# EAGLE board InkTime (EAGLE 9.7.0)
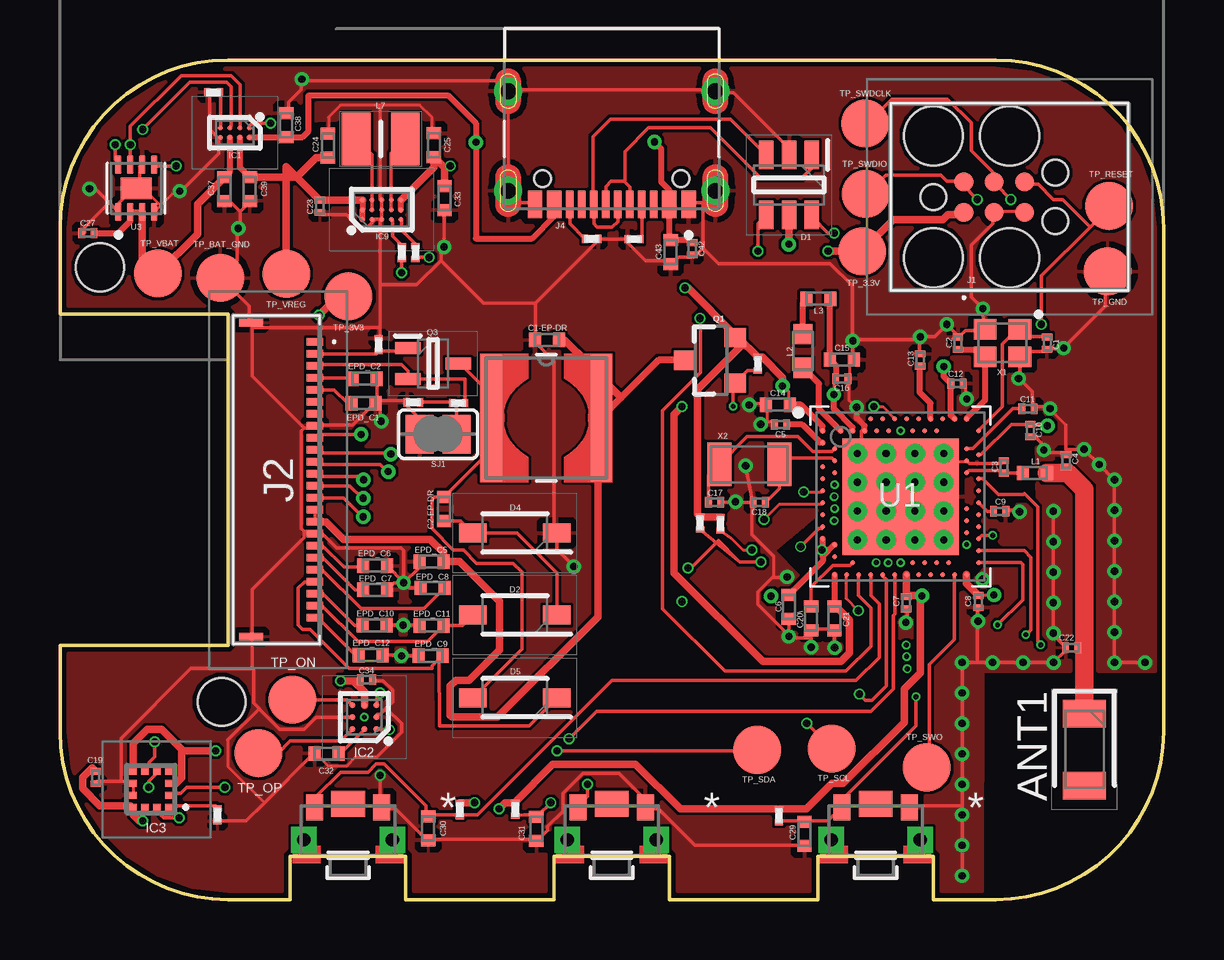
[diagram p0: board, top side]
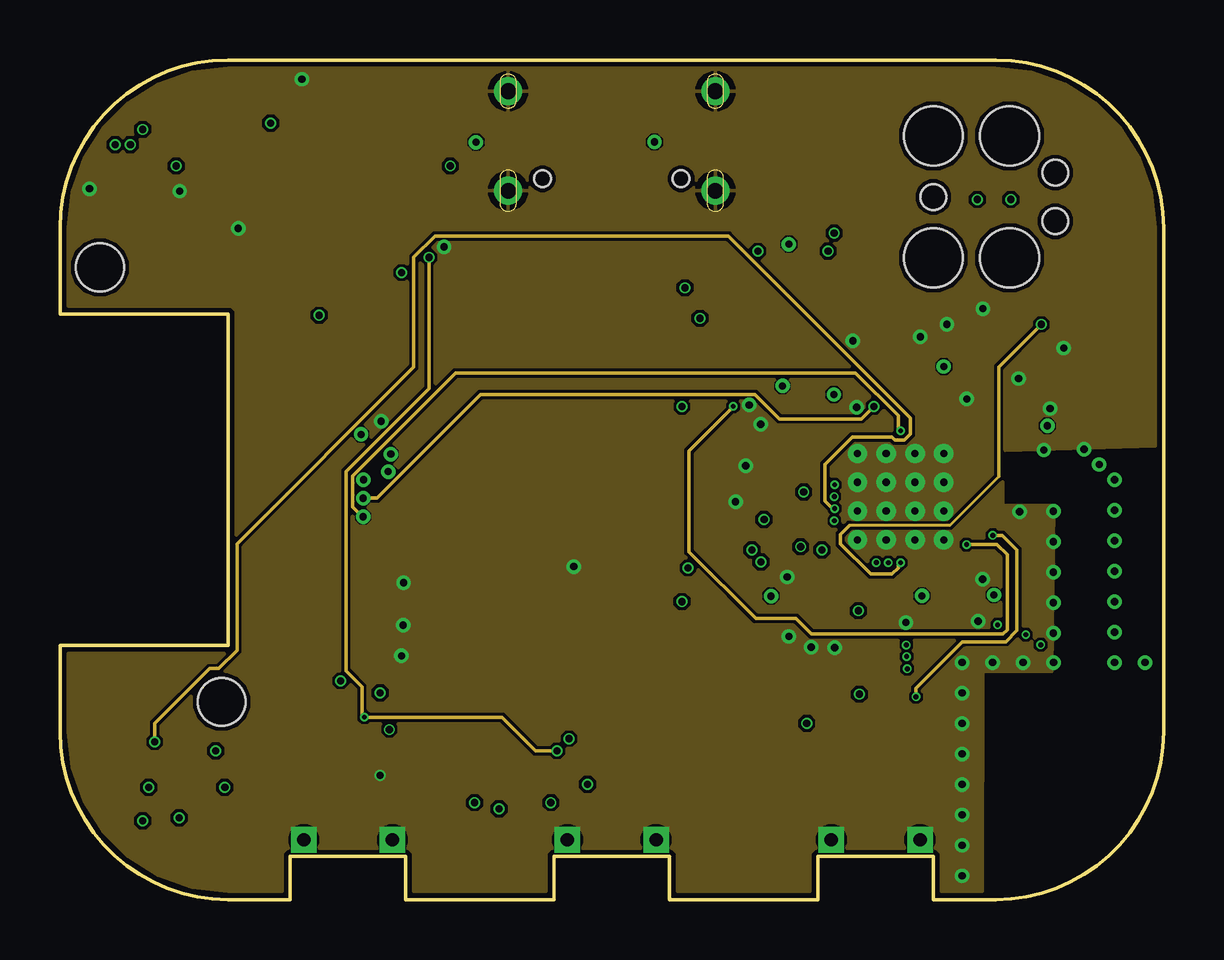
[diagram p1: board, inner layer GND]
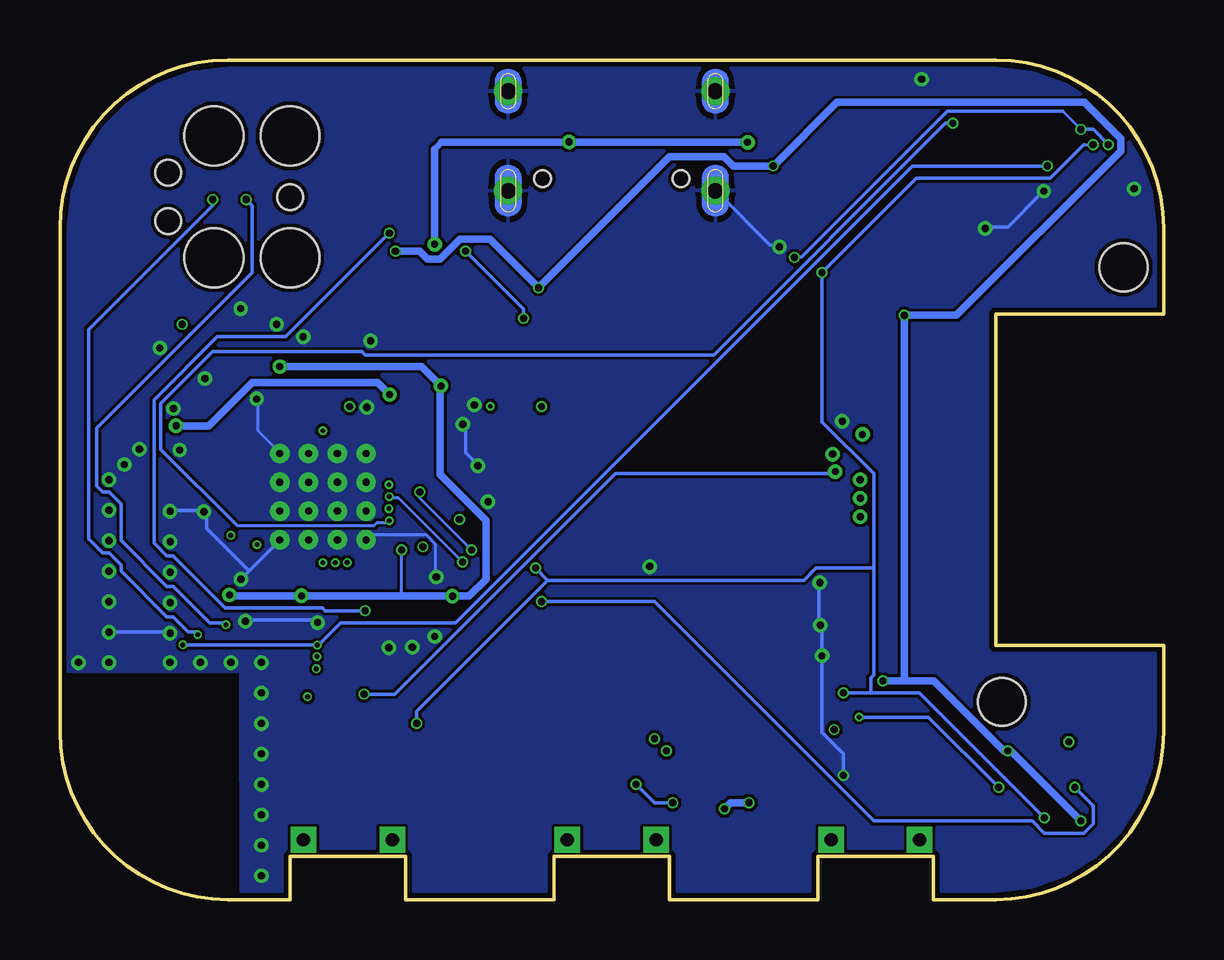
[diagram p2: board, bottom side, seen from below]

Size 46 x 35 mm. Coordinates in mm from the lower left corner, seen from the top.
Outline: 39,0 36.4,0 36.4,1.8 31.6,1.8 31.6,0 25.4,0 25.4,1.8 20.6,1.8 20.6,0 14.4,0 14.4,1.8 9.6,1.8 9.6,0 7,0 arc-90 0,7 0,10.6 7,10.6 7,24.4 0,24.4 0,28 arc-90 7,35 39,35 arc-90 46,28 46,7 arc-90 39,0
Copper layers (1+2*63+16): Top / GND / Bottom / layer 63
Stack-up 4 Layer Stack: Top SilkScreen Epoxy Ink / Top SolderMask User Defined 0.02mm Dk 4.3 / Top Surface Finish Lead-Free 0.02mm / Top User Defined 0.03mm / Dielectric-1 User Defined 0.034mm / Dielectric-2 User Defined 0.034mm / GND User Defined 0.03mm / Dielectric-3 User Defined 0.664mm / Power User Defined 0.03mm / Dielectric-4 User Defined 0.034mm / Dielectric-5 User Defined 0.034mm / Bottom User Defined 0.03mm / Bottom Surface Finish Lead-Free 0.02mm / Bottom SolderMask User Defined 0.02mm Dk 4.3 / Bottom SilkScreen Epoxy Ink
Design rules: minimum copper width 5mil, minimum drill size 0.2mm, copper clearance wire_polygon to wire_polygon 5mil, copper clearance wire_polygon to pad_smd 5mil, copper clearance wire_polygon to via 5mil, copper clearance pad_smd to pad_smd 5mil, copper clearance pad_smd to via 5mil, copper clearance via to via 5mil, copper clearance smd to pad (same net) 5mil, copper clearance smd to via (same net) 5mil, copper clearance smd to smd (same net) 5mil, dimension clearance 0.2mm, via restrict clearance 0mil, restrict clearance 0mil, drill distance 6mil, keepout clearance 0mil
Holes 2 mm at 1.66,26.35 6.74,8.24

## Footprints (pad centres in the part's own frame; a part is rotated, then mirrored left to right if it is on the bottom)
2450AT18B100E_ANTC3216X140N = smd 1.15 x 1.8: 1 -1.5,0; 2 1.5,0
NORDIC_NRF_3_RESC0201_L = smd 0.28 x 0.43: 1 -0.255,0; 2 0.255,0
NORDIC_NRF_3_RESC0402_L = smd 0.5 x 0.6: 1 -0.5,0; 2 0.5,0
SOT95P280X145-6N = smd 1.2 x 0.6: 1 -1.25,0.95; 2 -1.25,0; 3 -1.25,-0.95; 4 1.25,-0.95; 5 1.25,0; 6 1.25,0.95
ESP32_C6_LIBRARY_5_SOD3716X135N = smd 1.15 x 0.8: 1 -1.75,0; 2 1.75,0
BQ25180YBGR_BGA8C40P2X4_100X155X50 = smd 0.2 x 0.2: A1 -0.2,0.6; A2 0.2,0.6; B1 -0.2,0.2; B2 0.2,0.2; C1 -0.2,-0.2; C2 0.2,-0.2; D1 -0.2,-0.6; D2 0.2,-0.6
DRV2605YZFR_BGA9C50P3X3_144X144X62 = smd 0.25 x 0.25: A1 -0.5,0.5; A2 0,0.5; A3 0.5,0.5; B1 -0.5,0; B2 0,0; B3 0.5,0; C1 -0.5,-0.5; C2 0,-0.5; C3 0.5,-0.5
BMA423_BMA423 = smd 0.3 x 0.35: 1 -0.75,-0.775; 2 -0.25,-0.775; 3 0.25,-0.775; 4 0.75,-0.775; 7 0.75,0.775; 8 0.25,0.775; 9 -0.25,0.775; 10 -0.75,0.775 | smd 0.35 x 0.3: 5 0.775,-0.25; 6 0.775,0.25; 11 -0.775,0.25; 12 -0.775,-0.25
RT6160AWSC_BGA15C40P3X5_140X230X60 = smd 0.216 x 0.216: A1 -0.4,0.8; A2 0,0.8; A3 0.4,0.8; B1 -0.4,0.4; B2 0,0.4; B3 0.4,0.4; C1 -0.4,0; C2 0,0; C3 0.4,0; D1 -0.4,-0.4; D2 0,-0.4; D3 0.4,-0.4; E1 -0.4,-0.8; E2 0,-0.8; E3 0.4,-0.8
TC2030-IDC_TC2030IDC = smd 0.783 x 0.783: 1 -0.953,-0.635; 2 -0.953,0.635; 3 0.317,-0.635; 4 0.317,0.635; 5 1.588,-0.635; 6 1.588,0.635 | hole 2.451: -2.223,-2.54; -2.223,2.54; 0.952,-2.54; 0.952,2.54 | hole 1.067: -2.223,0; 2.857,-1.016; 2.857,1.016
503480-2400_5034802400 = smd 0.3 x 0.7: 1 -5.75,1.525; 2 -5.25,1.525; 3 -4.75,1.525; 4 -4.25,1.525; 5 -3.75,1.525; 6 -3.25,1.525; 7 -2.75,1.525; 8 -2.25,1.525; 9 -1.75,1.525; 10 -1.25,1.525; 11 -0.75,1.525; 12 -0.25,1.525; 13 0.25,1.525; 14 0.75,1.525; 15 1.25,1.525; 16 1.75,1.525; 17 2.25,1.525; 18 2.75,1.525; 19 3.25,1.525; 20 3.75,1.525; 21 4.25,1.525; 22 4.75,1.525; 23 5.25,1.525; 24 5.75,1.525 | smd 0.3 x 1: MP1 -6.54,-1.125; MP2 6.54,-1.125
KH-TYPE-C-16P_KINGHELM_KH-TYPE-C-16P = smd 0.6 x 1.15: A1_B12 -3.2,4.725; A4_B9 -2.4,4.725; A9_B4 2.4,4.725; A12_B1 3.2,4.725 | smd 0.3 x 1.15: A5 -1.25,4.725; A6 -0.25,4.725; A7 0.25,4.725; A8 1.25,4.725; B5 1.75,4.725; B6 0.75,4.725; B7 -0.75,4.725; B8 -1.75,4.725 | drill 0.65 pad 1.05: SH1 -4.32,0; SH2 4.32,0; SH3 -4.32,4.15; SH4 4.32,4.15 | hole 0.7: -2.89,3.65; 2.89,3.65
NORDIC_NRF_2_RESC0402_L = smd 0.5 x 0.6: 1 -0.5,0; 2 0.5,0
NORDIC_NRF_2_RESC0603_L = smd 0.85 x 0.8: 1 -0.7,0; 2 0.7,0
ESP32_C6_LIBRARY_2_IND_4828-WE-TPC_WRE = smd 0.9 x 5.3: 1 -2.286,0; 2 2.286,0
MLP2016SR47MT0S1_INDC2016X100N = smd 1.2 x 2.2: 1 -1.028,0; 2 1.028,0
ESP32_C6_LIBRARY_4_ESP32_C6_LIBRARY_4_ESP32_C6_LIBRARY_4_ESP32_C6_LIBRARY_4_ESP32_WROVER_SPARKFUN-DISCRETESEMI_SOT23-3 = smd 0.8 x 0.9: 1 -0.95,-1; 2 0.95,-1; 3 0,1.1
ESP32_C6_LIBRARY_6_SOT65P210X110-3N = smd 1.05 x 0.5: 1 -1.05,0.65; 2 -1.05,-0.65; 3 1.05,0
CPF0201D7K68C1_0201 = smd 0.35 x 0.25: 1 0,0.275; 2 0,-0.275
ESP32_C6_LIBRARY_7_JUMPER_SJ = smd 1.168 x 1.6: 1 -0.762,0; 2 0.762,0
2025-10-22_07-23-44_LIBRARY_SW_EVP-AKE31A_PAN = smd 0.711 x 1.092: 1 -1.4,-0.972; 2 1.4,-0.972 | drill 0.559 pad 0.914 square: 3 -1.848,0.381; 4 1.848,0.381 | smd 1.397 x 1.092: 5 0,-1.124
HECTOR_WATCH_1_TP20R = smd 2 x 2: TP 0,0
NORDIC_NRF_4_AQFN50P700X700X85_HS-74N = smd 4.85 x 4.85: P$74 0,0 | drill 0.3 pad 0.6: P$75 -1.8,1.8; P$76 -0.6,1.8; P$77 0.6,1.8; P$78 1.8,1.8; P$79 -1.8,0.6; P$80 -0.6,0.6; P$81 0.6,0.6; P$82 1.8,0.6; P$83 -1.8,-0.6; P$84 -0.6,-0.6; P$85 0.6,-0.6; P$86 1.8,-0.6; P$87 -1.8,-1.8; P$88 -0.6,-1.8; P$89 0.6,-1.8; P$90 1.8,-1.8 | smd 0.2 x 0.2: P$A8 -1.25,3.25; P$A10 -0.75,3.25; P$A12 -0.25,3.25; P$A14 0.25,3.25; P$A16 0.75,3.25; P$A18 1.25,3.25; P$A20 1.75,3.25; P$A22 2.25,3.25; P$A23 2.75,3.25; P$AA24 3.25,-2.25; P$AB2 -2.75,-2.5; P$AC5 -2,-2.75; P$AC9 -1,-2.75; P$AC11 -0.5,-2.75; P$AC13 0,-2.75; P$AC15 0.5,-2.75; P$AC17 1,-2.75; P$AC19 1.5,-2.75; P$AC21 2,-2.75; P$AC24 3.25,-2.75; P$AD2 -2.75,-3.25; P$AD4 -2.25,-3.25; P$AD6 -1.75,-3.25; P$AD8 -1.25,-3.25; P$AD10 -0.75,-3.25; P$AD12 -0.25,-3.25; P$AD14 0.25,-3.25; P$AD16 0.75,-3.25; P$AD18 1.25,-3.25; P$AD20 1.75,-3.25; P$AD22 2.25,-3.25; P$AD23 2.75,-3.25; P$B1 -3.25,2.75; P$B3 -2.5,2.75; P$B5 -2,2.75; P$B7 -1.5,2.75; P$B9 -1,2.75; P$B11 -0.5,2.75; P$B13 0,2.75; P$B15 0.5,2.75; P$B17 1,2.75; P$B19 1.5,2.75; P$B24 3.25,2.75; P$C1 -3.25,2.25; P$D2 -2.75,2; P$D23 2.75,2; P$E24 3.25,1.75; P$F2 -2.75,1.5; P$F23 2.75,1.5; P$G1 -3.25,1.25; P$H2 -2.75,1; P$H23 2.75,1; P$J1 -3.25,0.75; P$J24 3.25,0.75; P$K2 -2.75,0.5; P$L1 -3.25,0.25; P$L24 3.25,0.25; P$M2 -2.75,0; P$N1 -3.25,-0.25; P$N24 3.25,-0.25; P$P2 -2.75,-0.5; P$P23 2.75,-0.5; P$R1 -3.25,-0.75; P$R24 3.25,-0.75; P$T2 -2.75,-1; P$T23 2.75,-1; P$U1 -3.25,-1.25; P$U24 3.25,-1.25; P$V23 2.75,-1.5; P$W1 -3.25,-1.75; P$W24 3.25,-1.75; P$Y2 -2.75,-2; P$Y23 2.75,-2
ESP32_C6_LIBRARY_SON50P200X200X80-9N = smd 0.76 x 0.27: 1 -0.985,0.75; 2 -0.985,0.25; 3 -0.985,-0.25; 4 -0.985,-0.75; 5 0.985,-0.75; 6 0.985,-0.25; 7 0.985,0.25; 8 0.985,0.75 | smd 0.9 x 1.3: 9 0,0
NORDIC_NRF_BT-XTAL_2016_N = smd 0.95 x 0.85: 1 -0.725,-0.575; 2 0.725,-0.575; 3 0.725,0.575; 4 -0.725,0.575
NORDIC_NRF_1_XTAL_3215_N = smd 1 x 1.8: 1 -1.25,0; 2 1.25,0

## Placement (x,y rotation side)
ANT1  2450AT18B100E  [2450AT18B100E_ANTC3216X140N]  42.7,6.26 270 top
C1  12pF  [NORDIC_NRF_3_RESC0201_L]  41.15,23.19 90 top
C1-EP-DR  10uF  [NORDIC_NRF_3_RESC0402_L]  20.3,23.33 180 top
C2  12pF  [NORDIC_NRF_3_RESC0201_L]  37.43,23.19 90 top
C2-EP-DR  4.7uF/25V  [NORDIC_NRF_3_RESC0402_L]  16.01,16.29 90 top
C3  1pF  [NORDIC_NRF_3_RESC0201_L]  39.34,18.03 270 top
C4  1pF  [NORDIC_NRF_3_RESC0201_L]  41.94,18.28 270 top
C5  100nF  [NORDIC_NRF_3_RESC0201_L]  30.04,19.8 0 top
C6  4.7uF  [NORDIC_NRF_3_RESC0402_L]  30.38,12.19 270 top
C7  100nF  [NORDIC_NRF_3_RESC0201_L]  35.27,12.37 90 top
C8  100nF  [NORDIC_NRF_3_RESC0201_L]  38.28,12.42 90 top
C9  820pF  [NORDIC_NRF_3_RESC0201_L]  39.17,16.18 180 top
C10  N.C.  [NORDIC_NRF_3_RESC0201_L]  40.45,19.55 90 top
C11  100pF  [NORDIC_NRF_3_RESC0201_L]  40.35,20.46 180 top
C12  100nF  [NORDIC_NRF_3_RESC0201_L]  37.39,21.51 180 top
C13  N.C.  [NORDIC_NRF_3_RESC0201_L]  35.85,22.49 270 top
C14  4.7uF  [NORDIC_NRF_3_RESC0402_L]  29.93,20.63 180 top
C15  1.0uF  [NORDIC_NRF_3_RESC0402_L]  32.59,22.51 0 top
C16  47nF  [NORDIC_NRF_3_RESC0201_L]  32.59,21.7 180 top
C17  12pF  [NORDIC_NRF_3_RESC0201_L]  27.29,16.56 180 top
C18  12pF  [NORDIC_NRF_3_RESC0201_L]  29.15,16.56 0 top
C19  100nF  [NORDIC_NRF_3_RESC0201_L]  1.49,5.09 90 top
C20\  4.7uF  [NORDIC_NRF_3_RESC0402_L]  31.31,11.72 270 top
C21  4.7uF  [NORDIC_NRF_3_RESC0402_L]  32.28,11.72 270 top
C22  N.C.  [NORDIC_NRF_3_RESC0201_L]  42.17,10.5 0 top
C23  0.1uF  [NORDIC_NRF_3_RESC0201_L]  10.83,28.9 90 top
C24  10uF  [NORDIC_NRF_3_RESC0402_L]  11.17,31.43 270 top
C25  22uF  [NORDIC_NRF_3_RESC0402_L]  15.59,31.45 90 top
C27  0.1uF  [NORDIC_NRF_3_RESC0201_L]  1.16,27.78 180 top
C29  1uF  [NORDIC_NRF_3_RESC0402_L]  31.03,2.75 270 top
C30  1uF  [NORDIC_NRF_3_RESC0402_L]  15.35,2.97 270 top
C31  1uF  [NORDIC_NRF_3_RESC0402_L]  19.86,2.95 270 top
C32  1uF  [NORDIC_NRF_3_RESC0402_L]  11.11,6.08 180 top
C33  22uF  [NORDIC_NRF_3_RESC0402_L]  16.03,29.23 270 top
C34  0.1uF  [NORDIC_NRF_3_RESC0201_L]  12.78,9.17 0 top
C37  1uF  [NORDIC_NRF_3_RESC0402_L]  6.86,29.61 270 top
C38  1uF  [NORDIC_NRF_3_RESC0402_L]  9.43,32.29 90 top
C39  10uF  [NORDIC_NRF_3_RESC0402_L]  7.91,29.62 270 top
C42  0.1uF  [NORDIC_NRF_3_RESC0201_L]  26.35,27.13 270 top
C43  4.7uF  [NORDIC_NRF_3_RESC0402_L]  25.45,26.99 270 top
D1  USBLC6-2SC6Y  [SOT95P280X145-6N]  30.39,29.79 270 top
D2  MBR0530  [ESP32_C6_LIBRARY_5_SOD3716X135N]  18.96,11.86 180 top
D4  MBR0530  [ESP32_C6_LIBRARY_5_SOD3716X135N]  18.96,15.28 180 top
D5  MBR0530  [ESP32_C6_LIBRARY_5_SOD3716X135N]  18.96,8.41 180 top
EPD_C1  1uF/50V  [NORDIC_NRF_3_RESC0402_L]  12.66,20.69 180 top
EPD_C2  1uF/50V  [NORDIC_NRF_3_RESC0402_L]  12.7,21.71 180 top
EPD_C5  0.1uF/50V  [NORDIC_NRF_3_RESC0402_L]  15.48,14.09 0 top
EPD_C6  1uF/50V  [NORDIC_NRF_3_RESC0402_L]  13.13,13.92 180 top
EPD_C7  1uF/50V  [NORDIC_NRF_3_RESC0402_L]  13.13,12.91 180 top
EPD_C8  1uF/50V  [NORDIC_NRF_3_RESC0402_L]  15.53,12.99 0 top
EPD_C9  1uF/50V  [NORDIC_NRF_3_RESC0402_L]  15.45,10.16 0 top
EPD_C10  1uF/50V  [NORDIC_NRF_3_RESC0402_L]  13.11,11.43 180 top
EPD_C11  1uF/50V  [NORDIC_NRF_3_RESC0402_L]  15.49,11.42 0 top
EPD_C12  1uF/50V  [NORDIC_NRF_3_RESC0402_L]  12.95,10.19 180 top
IC1  BQ25180YBGR_BQ25180YBGR  [BQ25180YBGR_BGA8C40P2X4_100X155X50]  7.29,31.97 270 top
IC2  DRV2605YZFR  [DRV2605YZFR_BGA9C50P3X3_144X144X62]  12.69,7.6 180 top
IC3  BMA423  [BMA423_BMA423]  3.79,4.6 90 top
IC9  RT6160AWSC  [RT6160AWSC_BGA15C40P3X5_140X230X60]  13.41,28.76 90 top
J1  TC2030-IDC  [TC2030-IDC_TC2030IDC]  38.63,29.29 0 top
J2  503480-2400  [503480-2400_5034802400]  9.1,17.5 270 top
J4  KH-TYPE-C-16P  [KH-TYPE-C-16P_KINGHELM_KH-TYPE-C-16P]  23,33.7 180 top
L1  3.9nH  [NORDIC_NRF_2_RESC0402_L]  40.64,17.78 0 top
L2  10uH  [NORDIC_NRF_2_RESC0603_L]  30.97,22.87 270 top
L3  15nH  [NORDIC_NRF_2_RESC0402_L]  31.62,25.04 0 top
L5  68uH  [ESP32_C6_LIBRARY_2_IND_4828-WE-TPC_WRE]  20.27,20.08 0 top
L7  FTC252012SR47MBCA  [MLP2016SR47MT0S1_INDC2016X100N]  13.37,31.71 0 top
Q1  20V/4.2A/52mΩ/1.4W  [ESP32_C6_LIBRARY_4_ESP32_C6_LIBRARY_4_ESP32_C6_LIBRARY_4_ESP32_C6_LIBRARY_4_ESP32_WROVER_SPARKFUN-DISCRETESEMI_SOT23-3]  27.14,22.48 90 top
Q3  SI1308EDL-T1-GE3  [ESP32_C6_LIBRARY_6_SOT65P210X110-3N]  15.55,22.35 0 top
R1_EP_DR  0.47  [CPF0201D7K68C1_0201]  16.61,20.7 90 top
R1_USB  5K1  [CPF0201D7K68C1_0201]  23.93,27.53 90 top
R2  0  [CPF0201D7K68C1_0201]  14.82,26.97 0 top
R2_EP_DR  10K  [CPF0201D7K68C1_0201]  13.28,23.13 0 top
R2_USB  5K1  [CPF0201D7K68C1_0201]  22.17,27.54 90 top
R3  0  [CPF0201D7K68C1_0201]  6.56,3.53 0 top
R4  0  [CPF0201D7K68C1_0201]  14.25,26.97 0 top
R5  10K  [CPF0201D7K68C1_0201]  16.66,3.75 180 top
R7  10K  [CPF0201D7K68C1_0201]  29.97,3.49 180 top
R8  10K  [CPF0201D7K68C1_0201]  18.98,3.76 180 top
R9  10K  [CPF0201D7K68C1_0201]  6.4,33.64 90 top
R17  3K3  [CPF0201D7K68C1_0201]  26.68,15.7 0 top
R18  3K3  [CPF0201D7K68C1_0201]  27.53,15.67 0 top
R_PWR_EDP  10K  [CPF0201D7K68C1_0201]  29.09,22.33 180 top
R_TYPE_SEL  2.2  [CPF0201D7K68C1_0201]  14.73,20.73 90 top
SJ1  [ESP32_C6_LIBRARY_7_JUMPER_SJ]  15.76,19.4 0 top
SW1  2025-10-22_07-23-44_LIBRARY_EVP-AKE31ASW_EVP-AKE31A_PAN  [2025-10-22_07-23-44_LIBRARY_SW_EVP-AKE31A_PAN]  23,2.87 180 top
SW2  2025-10-22_07-23-44_LIBRARY_EVP-AKE31ASW_EVP-AKE31A_PAN  [2025-10-22_07-23-44_LIBRARY_SW_EVP-AKE31A_PAN]  12.01,2.87 180 top
SW3  2025-10-22_07-23-44_LIBRARY_EVP-AKE31ASW_EVP-AKE31A_PAN  [2025-10-22_07-23-44_LIBRARY_SW_EVP-AKE31A_PAN]  34,2.87 180 top
TP_3.3V  HECTOR_WATCH_1_TPTP20R  [HECTOR_WATCH_1_TP20R]  33.44,27.03 0 top
TP_3V3  HECTOR_WATCH_1_TPTP20R  [HECTOR_WATCH_1_TP20R]  12.02,25.15 0 top
TP_BAT_GND  HECTOR_WATCH_1_TPTP20R  [HECTOR_WATCH_1_TP20R]  6.68,25.92 0 top
TP_GND  HECTOR_WATCH_1_TPTP20R  [HECTOR_WATCH_1_TP20R]  43.67,26.18 0 top
TP_ON  HECTOR_WATCH_1_TPTP20R  [HECTOR_WATCH_1_TP20R]  9.68,8.33 0 top
TP_OP  HECTOR_WATCH_1_TPTP20R  [HECTOR_WATCH_1_TP20R]  8.27,6.1 0 top
TP_RESET  HECTOR_WATCH_1_TPTP20R  [HECTOR_WATCH_1_TP20R]  43.73,28.91 0 top
TP_SCL  HECTOR_WATCH_1_TPTP20R  [HECTOR_WATCH_1_TP20R]  32.17,6.3 0 top
TP_SDA  HECTOR_WATCH_1_TPTP20R  [HECTOR_WATCH_1_TP20R]  29.07,6.24 0 top
TP_SWDCLK  HECTOR_WATCH_1_TPTP20R  [HECTOR_WATCH_1_TP20R]  33.57,32.35 0 top
TP_SWDIO  HECTOR_WATCH_1_TPTP20R  [HECTOR_WATCH_1_TP20R]  33.59,29.41 0 top
TP_SWO  HECTOR_WATCH_1_TPTP20R  [HECTOR_WATCH_1_TP20R]  36.13,5.51 180 top
TP_VBAT  HECTOR_WATCH_1_TPTP20R  [HECTOR_WATCH_1_TP20R]  4.08,26.1 0 top
TP_VREG  HECTOR_WATCH_1_TPTP20R  [HECTOR_WATCH_1_TP20R]  9.43,26.09 0 top
U1  NRF52840_QF  [NORDIC_NRF_4_AQFN50P700X700X85_HS-74N]  35.04,16.79 0 top
U3  MAX17048G+T10  [ESP32_C6_LIBRARY_SON50P200X200X80-9N]  3.18,29.65 90 top
X1  32MHz  [NORDIC_NRF_BT-XTAL_2016_N]  39.29,23.2 180 top
X2  32.768kHz  [NORDIC_NRF_1_XTAL_3215_N]  28.73,18.14 0 top

## Library data of the parts
ANT1 = InkTime_v5; ARROW_PART_NUMBER: 2450AT18B100E; ARROW_PRICE-STOCK: https://www.arrow.com/en/products/2450at18b100e/johanson-dielectrics?utm_currency=USD&region=nac; DESCRIPTION: Antennas 2.45GHz ANTENNA; HEIGHT: 1.4mm; MANUFACTURER_NAME: JOHANSON TECHNOLOGY; MANUFACTURER_PART_NUMBER: 2450AT18B100E; MOUSER_PART_NUMBER: 609-2450AT18B100E; MOUSER_PRICE-STOCK: https://www.mouser.co.uk/ProductDetail/Johanson-Technology/2450AT18B100E?qs=yCnrNFeXz%252Bh5MFsFIXGZGA%3D%3D
C1 C1-EP-DR C2 C2-EP-DR C3-C19 C20\ C21-C25 C27 C29-C34 C37-C39 C42 C43 EPD_C1 EPD_C2 EPD_C5-EPD_C12 L1-L3 R1_EP_DR R1_USB R2 R2_EP_DR R2_USB R3-R5 R7-R9 R17 R18 R_PWR_EDP R_TYPE_SEL SJ1 TP_3.3V TP_3V3 TP_BAT_GND TP_GND TP_ON TP_OP TP_RESET TP_SCL TP_SDA TP_SWDCLK TP_SWDIO TP_SWO TP_VBAT TP_VREG U1 X1 X2 = InkTime_v5
D1 = InkTime_v5; ARROW_PART_NUMBER: USBLC6-2SC6Y; ARROW_PRICE-STOCK: https://www.arrow.com/en/products/usblc6-2sc6y/stmicroelectronics?utm_currency=USD&region=nac; DESCRIPTION: Low Cap. ESD Protection Auto SOT-23-6 STMicroelectronics USBLC6-2SC6Y, Dual Uni-Directional TVS Diode Array, 6-Pin SOT-23; HEIGHT: 1.45mm; MANUFACTURER_NAME: STMicroelectronics; MANUFACTURER_PART_NUMBER: USBLC6-2SC6Y; MOUSER_PART_NUMBER: 511-USBLC6-2SC6Y; MOUSER_PRICE-STOCK: https://www.mouser.co.uk/ProductDetail/STMicroelectronics/USBLC6-2SC6Y?qs=gNDSiZmRJS%2FOgDexvXkdow%3D%3D
D2 D4 D5 = InkTime_v5; AVAILABILITY: In Stock; CHECK_PRICES: https://www.snapeda.com/parts/MBR0530/Onsemi/view-part/?ref=eda; DESCRIPTION: Diode Schottky 30 V 500mA Surface Mount SOD-123; MF: ON Semiconductor; MP: MBR0530; PACKAGE: SOD-123-2 ON Semiconductor; PRICE: None; PURCHASE-URL: https://www.snapeda.com/api/url_track_click_mouser/?unipart_id=179458&manufacturer=ON Semiconductor&part_name=MBR0530&search_term=None; SNAPEDA_LINK: https://www.snapeda.com/parts/MBR0530/Onsemi/view-part/?ref=snap
IC1 = InkTime_v5; ARROW_PART_NUMBER: BQ25180YBGR; ARROW_PRICE-STOCK: https://www.arrow.com/en/products/bq25180ybgr/texas-instruments?utm_currency=USD&region=nac; DESCRIPTION: Charger IC Lithium Ion/Polymer, Lithium Iron Phosphate 8-DSBGA (1.6x1.1); HEIGHT: 0.5mm; MANUFACTURER_NAME: Texas Instruments; MANUFACTURER_PART_NUMBER: BQ25180YBGR; MOUSER_PART_NUMBER: 595-BQ25180YBGR; MOUSER_PRICE-STOCK: https://www.mouser.co.uk/ProductDetail/Texas-Instruments/BQ25180YBGR?qs=doiCPypUmgEWjAK%252BJAX6Tw%3D%3D
IC2 = InkTime_v5; ARROW_PART_NUMBER: DRV2605YZFR; ARROW_PRICE-STOCK: https://www.arrow.com/en/products/drv2605yzfr/texas-instruments?region=nac; DESCRIPTION: Haptic Driver for ERM/LRA with Built-In Library and Smart Loop Architecture; HEIGHT: 0.625mm; MANUFACTURER_NAME: Texas Instruments; MANUFACTURER_PART_NUMBER: DRV2605YZFR
IC3 = InkTime_v5; ARROW_PART_NUMBER: BMA423; ARROW_PRICE-STOCK: https://www.arrow.com/en/products/bma423/bosch; DESCRIPTION: Accelerometers Triaxial low-g 12bit Acceleration Sensor; HEIGHT: 1mm; MANUFACTURER_NAME: BOSCH; MANUFACTURER_PART_NUMBER: BMA423; MOUSER_PART_NUMBER: 262-BMA423; MOUSER_PRICE-STOCK: https://www.mouser.co.uk/ProductDetail/Bosch-Sensortec/BMA423?qs=HXFqYaX1Q2xC%252BSgeGoX3mg%3D%3D
IC9 = InkTime_v5; DESCRIPTION: Buck-Boost Regulator Positive Output Step-Up/Step-Down I2C DC-DC Controller IC 15-WL-CSP (BSC) (1.4x2.3); HEIGHT: 0.6mm; MANUFACTURER_NAME: RICHTEK; MANUFACTURER_PART_NUMBER: RT6160AWSC; MOUSER_PART_NUMBER: 835-RT6160AWSC; MOUSER_PRICE-STOCK: https://www.mouser.co.uk/ProductDetail/Richtek/RT6160AWSC?qs=amGC7iS6iy%2FLd9PSoixZXQ%3D%3D
J1 = InkTime_v5; DESCRIPTION: CABLE ADAPTER 6 POS; HEIGHT: 19mm; MANUFACTURER_NAME: Tag Connect; MANUFACTURER_PART_NUMBER: TC2030-IDC
J2 = InkTime_v5; DESCRIPTION: FFC & FPC Connectors 0.5mm FPC RA SMT Dual Contact 24Ckt; HEIGHT: 1.87mm; MANUFACTURER_NAME: Molex; MANUFACTURER_PART_NUMBER: 503480-2400; MOUSER_PART_NUMBER: 538-503480-2400; MOUSER_PRICE-STOCK: https://www.mouser.co.uk/ProductDetail/Molex/503480-2400?qs=OAhjpuo3Vu7efIoxFh9AOw%3D%3D
J4 = InkTime_v5; AVAILABILITY: Not in stock; CHECK_PRICES: https://www.snapeda.com/parts/KH-TYPE-C-16P/Kinghelm/view-part/?ref=eda; MF: kinghelm; MP: KH-TYPE-C-16P; PACKAGE: None; PRICE: None; SNAPEDA_LINK: https://www.snapeda.com/parts/KH-TYPE-C-16P/Kinghelm/view-part/?ref=snap
L5 = InkTime_v5; COPYRIGHT: Copyright (C) 2024 Ultra Librarian. All rights reserved.; MANUFACTURER_PART_NUMBER: 744043680; MFR_NAME: Wurth Electronics
L7 = InkTime_v5; DESCRIPTION: SMD / SMT Inductors (Coils), L=0.47?H, L x W x T :; HEIGHT: 1mm; JLCPCB: https://jlcpcb.com/partdetail/6763488-FTC252012SR47MBCA/C5832368; MANUFACTURER_NAME: TDK; MANUFACTURER_PART_NUMBER: FTC252012SR47MBCA
Q1 = InkTime_v5; PROD_ID: TRAN-14388
Q3 = InkTime_v5; AVAILABILITY: In Stock; CHECK_PRICES: https://www.snapeda.com/parts/SI1308EDL-T1-GE3/Vishay+Siliconix/view-part/?ref=eda; DESCRIPTION: Si1308EDL-T1-GE3 N-channel MOSFET Transistor, 1.5 A, 30 V, 3-Pin SC-70 | Siliconix / Vishay SI1308EDL-T1-GE3; MF: Vishay Siliconix; MP: SI1308EDL-T1-GE3; PACKAGE: SOT-323 Vishay Semiconductor; PRICE: None; PURCHASE-URL: https://www.snapeda.com/api/url_track_click_mouser/?unipart_id=274603&manufacturer=Vishay Siliconix&part_name=SI1308EDL-T1-GE3&search_term=None; SNAPEDA_LINK: https://www.snapeda.com/parts/SI1308EDL-T1-GE3/Vishay+Siliconix/view-part/?ref=snap
SW1-SW3 = InkTime_v5; COPYRIGHT: Copyright (C) 2025 Ultra Librarian. All rights reserved.; DIGI-KEY_PART_NUMBER_1: P123437TR-ND; DIGI-KEY_PART_NUMBER_2: P123437CT-ND; DIGI-KEY_PART_NUMBER_3: P123437DKR-ND; MANUFACTURER_NAME: Panasonic; MANUFACTURER_PART_NUMBER: EVP-AKE31A
U3 = InkTime_v5; AVAILABILITY: In Stock; CHECK_PRICES: https://www.snapeda.com/parts/MAX17048G+T10/Analog+Devices/view-part/?ref=eda; DESCRIPTION: 3µA 1-Cell/2-Cell Fuel Gauge with ModelGauge; MF: Analog Devices; MP: MAX17048G+T10; PACKAGE: TDFN-8 Maxim; PRICE: None; PURCHASE-URL: https://www.snapeda.com/api/url_track_click_mouser/?unipart_id=329239&manufacturer=Analog Devices&part_name=MAX17048G+T10&search_term=None; SNAPEDA_LINK: https://www.snapeda.com/parts/MAX17048G+T10/Analog+Devices/view-part/?ref=snap

## Nets
3V3: C6.1 C7.2 C8.2 C12.2 C14.1 C19.2 C25.1 C33.1 C34.1 IC2.C2 IC3.3 IC3.7 IC3.10 IC9.E2 IC9.E3 J1.1 Q1.2 R5.2 R7.2 R8.2 R17.1 R18.1 R_PWR_EDP.2 TP_3.3V.TP TP_3V3.TP U1.P$A22 U1.P$AD14 U1.P$AD23 U1.P$B1 U1.P$W1 U1.P$Y2
ALERT: U1.P$J24 U3.5
D+: D1.4 U1.P$AD6
D-: D1.6 U1.P$AD4
DEC1: C5.2 U1.P$C1
DEC3: C11.2 U1.P$D23
DEC4_6: C10.2 C15.1 C16.2 L3.2 U1.P$B5 U1.P$E24
DN: D1.1 J4.A7 J4.B7
DP: D1.3 J4.A6 J4.B6
EPD_3V3: C1-EP-DR.1 EPD_C5.2 J2.15 J2.16 L5.2 Q1.3
EPD_BUSY: J2.9 U1.P$AD12
EPD_CS: J2.12 U1.P$K2
EPD_DC: J2.11 U1.P$AD10
EPD_RST: J2.10 U1.P$AC11
GDR: J2.2 Q3.1 R2_EP_DR.2
GND: C1-EP-DR.2 C1.1 C2.2 C3.1 C4.1 C5.1 C6.2 C7.1 C8.1 C9.1 C10.1 C11.1 C12.1 C13.1 C14.2 C15.2 C16.1 C17.1 C18.1 C19.1 C20\.2 C21.2 C22.1 C23.1 C24.1 C25.2 C27.2 C29.2 C30.2 C31.2 C32.2 C33.2 C34.2 C37.2 C38.2 C39.2 C42.2 C43.2 D1.2 D4.1 EPD_C1.1 EPD_C2.1 EPD_C5.1 EPD_C6.1 EPD_C7.1 EPD_C8.1 EPD_C9.1 EPD_C10.1 EPD_C11.1 EPD_C12.1 IC1.D2 IC2.B1 IC2.B3 IC3.8 IC3.9 IC9.B1 IC9.C1 IC9.C2 IC9.C3 J1.3 J1.5 J2.8 J2.17 J2.MP1 J2.MP2 J4.A1_B12 J4.A12_B1 J4.SH1 J4.SH2 J4.SH3 J4.SH4 R1_USB.1 R2_EP_DR.1 R2_USB.2 R3.2 R9.1 R_TYPE_SEL.1 SJ1.1 SW1.1 SW2.1 SW3.1 TP_BAT_GND.TP TP_GND.TP U1.P$74 U1.P$75 U1.P$76 U1.P$77 U1.P$78 U1.P$79 U1.P$80 U1.P$81 U1.P$82 U1.P$83 U1.P$84 U1.P$85 U1.P$86 U1.P$87 U1.P$88 U1.P$89 U1.P$90 U1.P$B7 U1.P$F23 U3.1 U3.4 U3.6 U3.9 X1.2 X1.4
HAPTIC_EN: IC2.A1 U1.P$U1
IMU_INT1: IC3.5 U1.P$N1
IMU_INT2: IC3.6 U1.P$P2
LX1: IC9.B2 IC9.B3 L7.1
LX2: IC9.D2 IC9.D3 L7.2
MOSI: J2.14 U1.P$B13
N$1: IC9.E1 R2.1
N$2: IC1.D1 R9.2
N$3: IC9.D1 R4.1
N$4: C9.2 U1.P$N24
N$5: IC3.1 R3.1
N$6: C1.2 U1.P$B24 X1.1
N$7: C3.2 L1.1 U1.P$H23
N$8: L2.1 L3.1
N$11: C13.2 U1.P$A18
N$14: L2.2 U1.P$B3
N$15: C20\.1 U1.P$AC5
N$19: C2-EP-DR.2 D5.2 L5.1 Q3.3
N$20: R1_EP_DR.1 R_TYPE_SEL.2 SJ1.2
N$21: C2-EP-DR.1 D2.1 D4.2
N$22: EPD_C2.2 J2.4
N$23: EPD_C1.2 J2.5
N$24: C32.1 IC2.A2
N$25: EPD_C6.2 J2.18
N$26: EPD_C7.2 J2.19
N$27: EPD_C8.2 J2.20
N$28: J4.B5 R2_USB.1
N$29: EPD_C10.2 J2.22
N$30: C2.1 U1.P$A23 X1.3
N$31: EPD_C12.2 J2.24
N$34: J4.A5 R1_USB.2
OUT+: IC2.A3 TP_OP.TP
OUT-: IC2.C3 TP_ON.TP
P0.00/XL1: C17.2 U1.P$D2 X2.1
P0.01/XL2: C18.2 U1.P$F2 X2.2
P0.13: C30.1 R5.1 SW2.2 U1.P$AD8
P0.14: C31.1 R8.1 SW1.2 U1.P$AC9
P1.01: Q1.1 R_PWR_EDP.1 U1.P$Y23
P1.02: C29.1 R7.1 SW3.2 U1.P$W24
PMIC_INT: IC1.A1 U1.P$T2
PREVGH: D5.1 EPD_C9.2 J2.21
PREVGL: D2.2 EPD_C11.2 J2.23
RESE: J2.3 Q3.2 R1_EP_DR.2
RESET: J1.6 TP_RESET.TP U1.P$AC13
RF: ANT1.1 C4.2 C22.2 L1.2
SCK: J2.13 U1.P$A12
SCL: IC1.B1 IC2.C1 IC3.12 R4.2 R17.2 TP_SCL.TP U1.P$M2 U3.7
SDA: IC1.C1 IC2.B2 IC3.2 R2.2 R18.2 TP_SDA.TP U1.P$L1 U3.8
SWDCLK: J1.4 TP_SWDCLK.TP U1.P$AA24
SWDIO: J1.2 TP_SWDIO.TP U1.P$AC24
SWO: TP_SWO.TP U1.P$AD22
VBAT: C27.1 C37.1 IC1.C2 TP_VBAT.TP U3.2 U3.3
VBUS: C21.1 C38.1 C42.1 C43.1 D1.5 IC1.A2 J4.A4_B9 J4.A9_B4 U1.P$AD2
VREG: C23.2 C24.2 C39.1 IC1.B2 IC9.A1 IC9.A2 IC9.A3 TP_VREG.TP

## Tracks (layer width: path | path; a pad name or v marks a point on that pad's centre or on a via)
3V3  (via drill 0.3, 0.3 pad 0.6)
  Top 0.127: 2.93,3.91 IC3.10 | 3.06,5.44 IC3.7 | 12.46,9.12 C34.1 | 11.57,25.12 11.95,25.12 TP_3V3.TP | 29.86,3.78 R7.2 29.98,3.78 | 37.61,28.55 J1.1 | 33.54,27.15 TP_3.3V.TP 33.41,27.02 | U1.P$W1 31.76,15.09 U1.P$W1 | v31.76,14.58 31.8,14.58 | 35.32,12.67 C7.2 | C8.2 38.37,12.67 38.88,12.67 v38.93,12.7 | C14.1 30.37,20.68 30.37,21.18 30.24,21.31 v30.12,21.41 | 35.86,12.58 v35.93,12.66
  Top 0.25: C6.1 31.8,14.11 31.8,14.3 | 31.8,14.3 31.8,14.58 U1.P$W1 | U1.P$Y2 31.8,14.3
  Top 0.254: U1.P$B1 31.79,19.73 30.89,20.63 C14.1 | U1.P$A22 37.13,20.2 C12.2 36.84,21.81 v36.84,22.22 | IC9.E2 IC9.E3
  Top 0.305: U1.P$AD23 37.79,13.17 C8.2 | U1.P$AD14 35.29,12.65 C7.2 | IC9.E3 15.59,30.54 C25.1 16.03,30.51 | C33.1 16.03,30.51 | Q1.2 28.27,23.43 R_PWR_EDP.2 29.27,22.61 30.12,21.76 v30.12,21.41 | 2.93,3.91 1.66,3.91 0.94,4.64 0.94,5.08 1.35,5.5 C19.2 | IC3.3 4.84,4.85 5.07,5.07 5.07,6.2 5.13,6.2 | 5.13,6.2 4.24,7.09 3.63,7.09 3.06,6.51 3.06,5.44 | v11.7,9.12 12.22,9.12 | 12.22,9.12 12.46,9.12 | 5.13,6.2 v6.49,6.2 | v3.44,3.28 3.31,3.28 3.06,3.53 3.06,3.78 IC3.10 | v10.81,24.36 11.57,25.12 | v17.29,4.04 16.78,4.04 R5.2 | 29.86,3.78 25.86,3.78 24,5.64 20.54,5.64 18.98,4.08 R8.2 18.55,4.04 v18.3,3.78 | 37.61,28.55 37.02,28.55 36.81,28.34 34.73,28.34 33.54,27.15 | Q1.2 28.44,23.11 26.58,21.26 26.58,16.07 R17.1 26.71,15.95 R18.1 | 35.32,12.67 35.83,12.67 v35.93,12.66 | Q1.2 28.14,23.53 26.17,25.5 v26.05,25.5 | v32.02,27.02 33.41,27.02 | 29.98,3.78 31.12,3.78 32.17,4.84 32.64,4.84 35.19,7.39 35.19,8.78 35.86,9.45 35.86,12.58 | v16.27,30.58 16.2,30.51 16.03,30.51 | IC2.C2 12.69,8.65 12.22,9.12
  Bottom 0.127: v6.49,6.2 6.36,6.2 | 31.76,12.66 v31.76,14.58
  Bottom 0.305: v38.93,12.7 38.89,12.66 v35.93,12.66 31.76,12.66 v29.65,12.66 v29.64,12.65 28.94,12.65 28.24,13.35 28.24,15.81 30.15,17.72 30.15,21.38 v30.12,21.41 30.93,22.22 v36.84,22.22 | 10.81,9.12 9.58,9.12 6.66,6.2 v6.49,6.2 | 10.81,9.12 v11.7,9.12 | 6.36,6.2 v3.44,3.28 | 10.81,9.12 v10.81,24.36 8.64,24.36 1.79,31.2 1.79,31.73 3.3,33.23 13.62,33.23 v16.27,30.58 17.94,30.58 18.32,30.96 20.58,30.96 v26.05,25.5 28.08,27.53 29.32,27.53 30.16,26.69 30.67,26.69 31,27.02 v32.02,27.02 | v17.29,4.04 18.05,4.04 v18.3,3.78
ALERT  (via drill 0.2 pad 0.35, 0.3)
  Top 0.127: 3.95,30.58 U3.5 | v40.89,10.63 40.91,10.64 v40.88,10.62
  Top 0.152: U1.P$J24 38.46,17.54 39.11,16.89 40.15,16.89 40.19,16.93 40.75,16.37 40.75,10.77 v40.89,10.63 | v4.84,30.58 3.95,30.58
  Bottom 0.127: 35.19,10.64 v35.28,10.61
  Bottom 0.152: v35.28,10.61 v40.87,10.61 v40.88,10.62 | v4.84,30.58 10.47,30.58 29.52,11.53 34.3,11.53 35.19,10.64
D+  (via drill 0.3)
  Top 0.127: 33.29,13.56 U1.P$AD6 | 29.35,28.42 D1.4
  Top 0.152: 33.29,13.56 33.29,12.67 33.8,12.17 33.8,10.56 32.76,9.52 27.72,9.52 25.12,12.12 25.12,20.38 26.7,21.96 26.7,24.21 v26.68,24.23 | v29.1,27.02 29.1,28.17 29.35,28.42
  Bottom 0.152: v26.68,24.23 26.68,24.61 v29.1,27.02
D-  (via drill 0.3)
  Top 0.127: v33.29,12.04 32.78,12.55 32.78,13.56 U1.P$AD4 | 31.38,28.42 D1.6
  Top 0.152: v32.27,27.79 32.02,27.79 31.38,28.42
  Bottom 0.152: v33.29,12.04 34.94,12.04 35.05,12.15 39.11,12.15 41.29,14.32 41.54,14.32 42.08,14.86 42.08,20.83 39.44,23.47 36.59,23.47 v32.27,27.79
DEC1
  Top 0.254: C5.2 30.3,19.79 30.94,19.79 31.69,19.04 U1.P$C1
DEC3
  Top 0.152: U1.P$D23 38.05,18.79 39.72,20.46 C11.2
DEC4_6  (via drill 0.3 pad 0.6)
  Top 0.127: C16.2 32.27,21.69 32.27,21.06 v32.26,21.05 | 40.53,19.79 C10.2
  Top 0.152: U1.P$E24 38.39,18.54 39.66,19.81 C10.2 | 40.53,19.79 41.03,19.79 v41.16,19.75
  Top 0.254: U1.P$B5 33.04,19.68 32.26,20.46 v32.26,21.05 | L3.2 32.09,25.01 C15.1 32.34,22.27 C16.2
  Bottom 0.305: v32.26,21.05 32.76,21.55 38,21.55 39.8,19.75 v41.16,19.75
DN
  Top 0.152: J4.B7 23.75,29.7 23.51,29.94 | 23.51,29.94 22.97,29.94 22.75,29.72 J4.A7 | 23.51,29.94 23.55,29.98 23.55,31.18 24.54,32.17 27.11,32.17 29.19,30.09 30.93,30.09 31.34,30.5 D1.1
DP
  Top 0.152: J4.A6 23.25,28.27 23.02,28.04 22.39,28.04 22.25,28.18 J4.B6 22.21,29.02 22.21,31.81 22.94,32.54 27.94,32.54 D1.3
EPD_3V3
  Top 0.127: 21.98,22.33 22.01,22.36
  Top 0.152: J2.15 J2.16 | 16.27,7.68 16.34,7.61 | 22.42,19.94 L5.2 | C1-EP-DR.1 21.04,23.33
  Top 0.3: Q1.3 24.96,22.48 23.39,20.92 L5.2
  Top 0.305: J2.16 11.09,15.75 11.82,15.02 15.43,15.02 15.98,14.47 EPD_C5.2 16.66,14.09 18.33,12.42 18.33,10.41 17.05,9.13 16.5,9.13 16.27,8.9 16.27,7.68 | 16.34,7.61 18.24,7.61 22.42,11.79 22.42,19.94 | 21.04,23.33 22.01,22.36 | 23.39,20.92 21.98,22.33
EPD_BUSY  (via drill 0.3, 0.3 pad 0.6)
  Top 0.127: 34.81,13.56 U1.P$AD12
  Top 0.152: J2.9 10.77,19.39 v12.55,19.39 | 34.81,13.56 34.81,11.91 34.75,11.85 34.75,8.79 33.81,7.85 22.36,7.85 v21.22,6.71
  Power 0.152: v21.22,6.71 20.08,6.71 19.95,6.83 14.11,6.83 13.86,6.58 13.09,6.58 12.21,7.47 12.21,19.02 12.46,19.28 v12.55,19.39
EPD_CS  (via drill 0.2 pad 0.35, 0.3 pad 0.6)
  Top 0.127: U1.P$K2 32.27,17.25 U1.P$K2 | 10.68,17.63 J2.12
  Top 0.152: 10.68,17.63 12.46,17.63 12.59,17.5 v12.65,17.5
  Power 0.127: 12.84,17.37 12.71,17.5 v12.65,17.5 | 32.27,17.37 U1.P$K2
  Power 0.152: 32.27,17.37 31.26,17.37 31.13,17.5 13.98,17.5 13.86,17.37 12.84,17.37
  other vias: 32.29,17.29
EPD_DC  (via drill 0.3, 0.3 pad 0.6)
  Top 0.127: 10.68,18.14 J2.11
  Top 0.152: U1.P$AD10 34.29,13.49 34.44,13.34 34.44,8.91 33.84,8.31 33.58,8.31 v33.33,8.56 | 10.68,18.14 13.35,18.14 13.6,17.88 v13.68,17.84
  Bottom 0.152: v33.33,8.56 32.05,8.56 22.85,17.75 13.73,17.75 v13.68,17.84
EPD_RST  (via drill 0.2 pad 0.35, 0.3 pad 0.6)
  Top 0.127: U1.P$AC11 34.56,14.07 v34.53,14.04
  Top 0.152: v13.79,18.57 13.74,18.62 10.76,18.62 J2.10
  Power 0.127: 13.8,18.71 v13.79,18.57
  Power 0.152: 13.8,18.71 14.36,19.28 34.68,19.28 34.81,19.15 35.19,19.15 35.32,19.28 37.1,19.28 38.24,18.14 38.24,14.71 37.1,13.56 34.94,13.56 34.56,13.94 v34.53,14.04
GDR
  Top 0.152: J2.2 13.18,22.75 R2_EP_DR.2 14.36,22.86 Q3.1
GND  (via drill 0.3, 0.3 pad 0.6)
  Top 0.127: 30.37,11.02 v30.38,10.97 | 32.27,11.28 C21.2 | 31.38,11.28 C20\.2 | 29.48,19.91 29.73,19.91 C5.1 | 29.48,19.91 29.22,19.91 v29.21,19.81 29.48,19.91 | v28.73,20.62 28.84,20.68 29.35,20.68 C14.2 29.48,20.55 29.48,19.91 | v28.15,16.59 v28.16,16.58 28.18,16.56 | 28.59,18.01 v28.58,18.08 | 28.84,16.69 C18.1 28.84,16.55 | 29.73,14.32 29.73,13.47 29.73,13.44 | J1.5 40.14,28.68 39,28.68 J1.3 38.88,28.55 | 38.49,24.61 v38.47,24.63 38.37,24.74 | 38.49,23.85 X1.2 38.49,23.72 | 35.83,22.83 C13.1 | 35.95,23.47 v35.86,23.46 35.83,23.34 | v36.97,23.98 | 37.48,23.47 C2.2 | v37.8,20.87 37.73,20.93 37.73,21.44 C12.1 | 33.03,23.21 v33.05,23.29 | 33.03,22.58 C15.2 33.03,22.45 32.91,22.33 32.91,21.82 C16.1 32.91,21.69 32.91,20.8 33.16,20.55 v33.21,20.52 | 33.29,18.64 33.41,18.77 | 36.84,18.52 37.1,18.26 37.73,18.26 U1.P$F23 | 33.29,16.1 33.29,15.09 U1.P$87 | 33.29,16.1 U1.P$83 | 33.29,16.1 U1.P$74 | U1.P$79 33.29,17.5 33.54,17.5 33.92,17.88 U1.P$74 | U1.P$88 34.43,15.09 34.43,16.1 U1.P$74 | U1.P$84 34.56,16.23 U1.P$74 | U1.P$80 34.43,17.5 U1.P$74 | U1.P$89 35.7,15.09 35.7,16.1 U1.P$74 | U1.P$74 35.57,16.23 U1.P$85 35.7,16.23 36.72,16.23 U1.P$86 36.84,16.1 36.84,15.09 U1.P$90 | U1.P$81 35.7,17.5 U1.P$74 | 33.29,18.64 U1.P$75 | 33.29,18.64 U1.P$74 | U1.P$76 34.43,18.52 33.92,18.01 U1.P$74 | 36.34,17.88 36.72,17.5 U1.P$82 | 36.34,17.88 36.21,17.88 U1.P$74 | 36.34,17.88 35.7,18.52 U1.P$77 | 36.34,17.88 U1.P$74 | 36.84,18.52 U1.P$78 | 36.84,18.52 U1.P$74 | 33.16,23.34 v33.05,23.29 | 41.92,10.39 C22.1 41.92,10.52 | 41.41,11.02 v41.41,11.11 41.41,11.15 | 39.51,16.23 C9.1 | 41.41,12.42 v41.41,12.38 41.41,12.29 | 41.41,13.56 v41.41,13.64 41.41,13.69
  Top 0.127: 41.41,14.96 v41.41,14.91 41.41,14.83 | 41.41,16.1 v41.41,16.18 | 35.45,3.91 SW3.1 | 35.32,12.04 C7.1 | 38.24,11.66 v38.27,11.6 38.24,11.53 | 38.24,12.17 C8.1 | 41.8,22.96 v41.84,22.99 41.92,23.09 | 41.16,22.96 C1.1 41.03,22.83 | 41.16,20.55 v41.27,20.47 41.29,20.42 41.92,19.79 | 40.65,20.55 C11.1 40.53,20.55 | 40.02,21.82 v39.96,21.72 40.02,21.69 | 40.02,22.58 X1.4 40.02,22.71 40.14,22.83 | 41.03,18.64 v41.01,18.74 | 41.85,18.64 C4.1 41.99,18.77 41.92,18.77 | 40.65,19.28 40.53,19.28 C10.1 | 43.57,26.14 TP_GND.TP | 26.94,29.06 26.81,29.06 | 26.3,29.06 J4.A1_B12 | 27.32,29.44 J4.SH3 | 25.79,26.77 25.54,26.52 C43.2 | 26.3,26.77 C42.2 26.43,26.77 | 23.64,27.53 R1_USB.1 23.64,27.41 | 19.82,23.34 C1-EP-DR.2 19.82,23.21 | 22.49,27.53 R2_USB.2 | 20.59,15.34 D4.1 | 16.02,27.28 v16.01,27.21 | 16.02,28.68 C33.2 | 19.7,29.06 J4.A12_B1 | 18.68,29.44 J4.SH4 18.68,29.56 18.68,33.63 J4.SH2 | C24.1 11.19,31.98 11.19,32.61 11.7,33.12 13.35,33.12 15,33.12 15.51,32.61 15.51,31.98 C25.2 | 13.35,28.3 IC9.C1 | 13.09,28.3 IC9.B1 | 13.35,29.18 IC9.C3 | 30.37,31.34 30.37,31.09 D1.2 | 27.45,33.63 J4.SH1 27.32,33.76 | 9.54,32.87 C38.2 | 10.17,34.14 v10.08,34.2 | 18.55,33.76 J4.SH2 | 18.68,33.76 J4.SH2 | 15.25,2.51 C30.2 15.38,2.51 | 13.47,3.78 SW2.1 13.35,3.91 | 19.82,2.51 C31.2 19.95,2.51 | 31,2.26 C29.2 | 24.52,3.78 SW1.1 24.4,3.91 24.4,4.16 | 7.51,28.04 v7.43,27.98 | 7.89,29.06 C39.2 | 7.12,29.06 6.87,29.06 C37.2 | 7.89,24.1 J2.MP1 8.01,23.98 8.01,23.85 | 6.74,25.88 TP_BAT_GND.TP | 1.03,28.04 1.03,27.79 C27.2 | 6.24,33.63 R9.1 | 4.2,28.93 3.95,28.68 U3.4 | 4.2,28.93 4.71,29.44 4.97,29.44 v4.99,29.53 5.09,29.56 | 3.32,29.82 3.19,29.69 U3.9 | 3.32,29.82 4.2,28.93
  Top 0.127: 3.32,29.82 U3.9 | 2.78,29.37 U3.9 | 14.36,20.8 R_TYPE_SEL.1 14.36,20.68 | 13.35,20.04 v13.39,19.94 | EPD_C1.1 13.35,20.8 13.22,20.8 EPD_C1.1 | 13.22,21.69 EPD_C2.1 | 10.68,19.79 J2.8 10.55,19.66 | 13.09,20.68 EPD_C1.1 | 10.55,15.34 J2.17 | 14.87,19.41 SJ1.1 | 13.35,7.72 13.22,7.72 | 13.86,8.23 13.6,7.97 | 13.09,9.12 C34.2 | 6.62,3.28 R3.2 | 10.55,6.07 C32.2 10.68,6.07 11.17,5.58 11.97,5.58 12.33,5.94 13.22,5.94 | IC3.9 3.06,4.42 3.06,4.8 IC3.8 2.93,4.93 | 1.54,4.93 C19.1 | 12.08,7.59 IC2.B3 | 8.01,10.9 J2.MP2 8.01,11.02 | 8.52,4.04 7,5.56 7,6.65 | 33.03,23.34 v33.05,23.29 | U3.1 2.3,28.8 U3.1
  Top 0.152: U1.P$F23 37.9,18.18 39.23,18.18 C3.1 | IC9.C3 IC9.C2 IC9.C1 IC9.B1 | 14.33,13.2 v14.32,13.21 | EPD_C10.1 v14.3,11.44 14.97,11.44 EPD_C11.1 | EPD_C12.1 14.21,10.19 v14.23,10.16 EPD_C9.1 | EPD_C7.1 13.92,13.2 14.33,13.2 | 14.33,13.2 14.35,13.2 EPD_C6.1 | J2.17 10.94,15.25 11.53,14.66 14.22,14.66 14.33,14.55 14.33,13.2 | v21.42,13.88 20.71,14.59 D4.1 | C6.2 v30.38,10.97 30.49,10.9 31.31,10.9 | C20\.2 31.31,10.9 | 31.31,10.9 v31.31,10.52 | C21.2 v32.28,10.51 v32.29,10.5 | EPD_C8.1 14.54,12.99 14.33,13.2 | EPD_C5.1 14.98,13.85 14.33,13.2 | 29.73,13.44 30.24,13.44 v30.31,13.45 | 29.73,13.47 29.1,12.83 29.1,12.29 30.37,11.02 | 31.38,11.28 32.27,11.28 | v28.15,16.59 C17.1 | 28.84,16.69 28.59,18.01 | 28.18,16.56 C18.1 | 29.73,14.32 28.84,15.21 28.84,16.55 | 38.49,23.85 38.49,24.61 | 35.83,22.83 35.83,23.34 33.16,23.34 | 35.95,23.47 36.46,23.47 v36.97,23.98 37.48,23.47 37.73,23.72 38.49,23.72 | 38.88,28.55 38.88,28.17 37.99,27.28 37.99,25.12 38.37,24.74 | 33.03,22.58 33.03,23.21 | 33.41,18.77 33.41,19.53 U1.P$B7 | 41.92,10.39 v41.41,9.88 v40.14,9.88 v38.88,9.88 38.24,9.88 | 41.92,10.52 41.41,11.02 | 39.51,16.23 39.92,16.23 v40,16.16 | 41.41,13.56 41.41,12.42 | 41.41,16.1 41.41,14.96 | 41.41,14.83 41.41,13.69 | 41.41,12.29 41.41,11.15 | v37.61,0.99 v37.61,2.26 v37.61,3.53 37.61,3.91 | 37.61,3.91 v37.61,4.8 v37.61,6.07 v37.61,7.34 v37.61,8.61 v37.61,9.88 38.24,9.88 | 37.61,3.91 35.45,3.91 | 35.32,12.04 35.32,11.66 v35.26,11.55 | 38.24,12.17 38.24,11.66 | 38.24,9.88 38.24,11.53 | v45.23,9.88 v43.95,9.88 v43.95,11.15 v43.95,12.42 v43.95,13.69 v43.95,14.96 v43.95,16.23 v43.95,17.5 v43.32,18.14 v42.69,18.77 41.99,18.77
  Top 0.152: 41.16,22.96 41.8,22.96 | 40.65,20.55 41.16,20.55 | 40.02,22.58 40.02,21.82 | 40.53,20.55 40.53,21.18 40.02,21.69 | 40.14,22.83 41.03,22.83 | 41.85,18.64 41.03,18.64 | 40.65,19.28 40.91,19.02 40.91,18.77 v41.01,18.74 | 41.92,18.77 41.92,19.79 | 43.57,26.14 43.57,24.74 41.92,23.09 | 26.3,29.06 26.81,29.06 26.81,27.15 | 27.32,29.44 26.94,29.06 | 25.79,26.77 26.3,26.77 | 23.64,27.53 22.49,27.53 19.82,24.87 | 19.82,24.87 19.82,23.34 | 23.64,27.41 24.4,26.64 25.34,26.64 C43.2 | 26.43,26.77 26.81,27.15 | 20.59,15.34 20.59,22.45 19.82,23.21 | 16.02,28.68 16.02,27.28 | 19.7,29.06 19.06,29.06 18.68,29.44 | 13.35,28.3 13.35,25.63 | 13.35,25.63 13.35,23.85 | 13.35,23.85 13.35,23.47 R2_EP_DR.1 | 13.09,28.3 12.82,28.02 12.48,28.02 11.95,28.55 10.94,28.55 C23.1 | 13.35,29.18 13.35,33.12 | 15.89,26.64 15.89,27.15 v16.01,27.21 | 15.89,26.64 14.87,25.63 13.35,25.63 | 30.37,31.34 28.08,33.63 27.45,33.63 | 9.54,32.87 9.54,33.25 10.05,33.76 10.05,34.14 v10.08,34.2 | 10.17,34.14 18.17,34.14 18.55,33.76 | 18.68,33.76 27.32,33.76 | 19.82,24.87 17.67,24.87 15.89,26.64 | 15.25,2.51 13.98,3.78 13.47,3.78 | 15.38,2.51 19.82,2.51 | 31,2.26 26.47,2.26 24.95,3.78 24.52,3.78 | 19.95,2.51 20.33,2.89 20.33,3.04 20.97,3.68 20.97,4.42 21.81,5.26 23.3,5.26 24.4,4.16 | 7.51,28.68 7.51,28.04 | 7.89,29.06 7.51,28.68 | 7.51,28.68 7.12,29.06 | 7.89,24.1 7.89,24.74 6.74,25.88 | v7.43,27.98 7.38,27.91 7.38,26.64 6.74,26.01 TP_BAT_GND.TP | 2.3,28.8 2.26,28.84 | 2.26,28.84 2.05,29.06 | 2.05,29.06 1.54,29.56 1.28,29.56 v1.23,29.63 | 2.05,29.06 1.03,28.04 | 6.62,31.72 6.24,32.11 6.24,33.63 | 3.32,29.82 3.32,30.58 U3.6 | 6.62,31.72 6.62,31.09 5.09,29.56 | 6.62,31.72 IC1.D2
  Top 0.152: 2.78,29.37 2.26,28.84 | 14.36,20.8 13.35,20.8 13.35,20.04 | 13.22,20.8 13.22,21.69 | 10.68,19.79 12.21,19.79 13.09,20.68 | 10.17,15.34 10.55,15.34 | 10.17,15.34 10.05,15.47 10.05,19.53 10.17,19.66 | 10.55,19.66 10.17,19.66 | 14.87,19.41 14.87,20.17 14.36,20.68 | 13.35,7.72 13.6,7.97 14.24,7.34 14.24,6.96 13.22,5.94 | 13.86,8.23 13.86,8.74 13.47,9.12 13.09,9.12 | 13.22,7.72 IC2.B1 | 6.62,3.28 7.76,3.28 8.52,4.04 10.55,6.07 | 2.93,4.93 2.55,4.93 | 2.55,4.93 1.54,4.93 | 12.08,7.59 10.68,7.59 10.17,7.09 9.16,7.09 8.29,7.95 | 8.01,10.9 8.01,9.63 | 2.55,4.93 2.55,6.73 5.45,9.63 8.01,9.63 | 8.01,9.63 8.07,9.63 8.07,8.2 8.31,7.96 8.29,7.95 | 8.29,7.95 7,6.65 | 10.17,15.34 10.17,15.09 8.01,12.93 8.01,11.02 | 10.17,19.66 8.01,21.82 8.01,23.85 13.35,23.85 | v13.35,5.18 13.35,3.91 | 33.03,23.34 33.03,25.59 32.1,26.52 27.45,26.52 26.81,27.15
  Top 0.254: U1.P$B7 33.54,19.74 33.21,20.07 v33.21,20.52
  Bottom 0.127: v37.8,20.87 37.73,20.8 37.73,19.53 36.84,18.64 U1.P$78 | 36.84,14.96 U1.P$90 | v30.31,13.45 30.37,13.56 30.37,14.83 30.75,15.21 33.03,15.21 33.16,15.09 U1.P$87 | 40.03,16.22 v40,16.16 | 41.31,16.22 v41.41,16.18 | 41.41,11.15 v41.41,11.11 | 16.02,27.28 v16.01,27.21 | 18.55,29.44 J4.SH4 | 7.38,28.04 v7.43,27.98 | 5.09,29.44 v4.99,29.53 | 14.24,11.4 v14.3,11.44 14.36,11.53 | 14.24,10.26 v14.23,10.16 14.24,10.13 | 14.36,13.18 v14.32,13.21
  Bottom 0.152: v29.21,19.81 29.1,19.79 29.1,18.64 28.59,18.14 v28.58,18.08 | 36.84,14.96 38.11,13.69 | 38.11,13.69 38.37,13.44 v38.46,13.35 | 41.31,16.22 40.03,16.22 | v35.26,11.55 35.32,11.66 38.24,11.66 v38.27,11.6 | v43.95,11.15 41.41,11.15 | 38.11,13.69 39.89,15.47 39.89,16.1 v40,16.16 | 16.02,27.28 16.4,27.28 18.55,29.44 | 7.38,28.04 6.49,28.04 5.09,29.44 | 14.24,10.26 14.24,11.4 | 14.36,13.18 14.36,11.53 | v13.35,5.18 13.35,6.07 14.24,6.96 14.24,10.13
  pour Top: 51.38,39.4 -2.7,39.4 -2.7,-1.76 51.38,-1.76
  pour GND: 53.01,41.03 -3.46,41.03 -3.46,-2.84 53.01,-2.84
  pour Power: 54.93,42.27 -4.26,42.27 -4.26,-4.52 54.93,-4.52
  pour Bottom: 56.86,43.33 -5.23,43.33 -5.23,-5.34 56.86,-5.34 56.86,-5.71
HAPTIC_EN  (via drill 0.3)
  Top 0.127: 13.22,7.09 IC2.A1
  Top 0.152: v30.87,14.71 31.64,15.47 31.76,15.47 U1.P$U1 | 13.22,7.09 v13.73,7.09
  Power 0.152: v30.87,14.71 30.49,14.71 23,7.21 13.86,7.21 v13.73,7.09
IMU_INT1  (via drill 0.3)
  Top 0.127: v29.35,15.85 29.98,16.48 31.76,16.48 U1.P$N1 | 4.08,5.3 IC3.5
  Top 0.152: v3.7,4.67 3.7,4.92 4.08,5.3
  Bottom 0.152: v25.92,12.42 21.22,12.42 12.08,3.28 5.47,3.28 4.97,2.77 3.32,2.77 2.93,3.15 2.93,3.91 v3.7,4.67
  Power 0.152: v25.92,12.42 v29.35,15.85
IMU_INT2  (via drill 0.2 pad 0.35, 0.3)
  Top 0.127: U1.P$P2 32.27,16.36 v32.29,16.3 | 3.44,5.44 IC3.6
  Top 0.152: v3.95,6.58 3.95,5.94 3.44,5.44
  GND 0.127: 32.14,16.36 32.27,16.36 v32.29,16.3
  GND 0.152: 32.14,16.36 31.89,16.61 31.89,18.14 33.03,19.28 34.68,19.28 34.81,19.15 35.19,19.15 35.45,19.41 35.45,20.07 27.86,27.66 15.63,27.66 14.74,26.77 14.74,22.2 7.38,14.83 7.38,10.39 6.62,9.63 6.24,9.63 3.95,7.34 v3.95,6.58
LX1
  Top 0.152: L7.1 13.01,31.04 IC9.B3 IC9.B2
LX2
  Top 0.152: L7.2 13.81,31.12 IC9.D3 IC9.D2
MOSI  (via drill 0.2 pad 0.35, 0.3 pad 0.6)
  Top 0.127: U1.P$B13 35.06,19.53 U1.P$B13 | 10.68,16.74 J2.14
  Top 0.152: 10.68,16.74 11.82,16.74 12.59,15.98 v12.64,15.96
  GND 0.127: 34.94,19.66 U1.P$B13 | 12.59,15.98 v12.64,15.96
  GND 0.152: 34.94,19.66 34.94,20.17 33.16,21.95 16.49,21.95 12.21,17.66 12.21,16.36 12.59,15.98
  other vias: 35.04,19.54
N$1
  Top 0.127: 14.87,27.28 R2.1
  Top 0.152: 14.87,27.28 14.24,27.91 14.24,28.3 IC9.E1
N$2
  Top 0.152: IC1.D1 6.69,33.62 R9.2
N$3
  Top 0.127: 13.86,28.3 IC9.D1
  Top 0.152: 13.86,28.3 13.86,27.66 14.24,27.28 R4.1
N$4
  Top 0.152: U1.P$N24 38.65,16.18 C9.2
N$5
  Top 0.127: 4.59,3.91 IC3.1 | 6.49,3.91 R3.1
  Top 0.152: 6.49,3.91 4.59,3.91
N$6
  Top 0.127: 40.27,23.47 40.02,23.72 X1.1 | 41.03,23.47 C1.2
  Top 0.152: U1.P$B24 39.29,20.54 39.29,23.15 39.92,23.78 X1.1 | 40.27,23.47 41.03,23.47
N$7
  Top 0.152: U1.P$H23 37.88,17.88 39.24,17.88 C3.2 L1.1
N$8
  Top 0.254: L2.1 30.97,24.89 L3.1
N$11
  Top 0.254: U1.P$A18 36.29,20.69 35.84,21.14 35.84,22.23 C13.2
N$14
  Top 0.254: U1.P$B3 31.64,20.44 31.64,21.5 L2.2
N$15
  Top 0.152: U1.P$AC5 32.93,13.93 32.21,13.93 31.31,13.03 C20\.1
N$19
  Top 0.152: Q3.3 16.67,22.35 17.98,21.04 L5.1 17.98,18.76 C2-EP-DR.2 15.61,16.79 15.5,16.68 15.5,15.46 16.39,14.57 16.82,14.57 17.37,14.02 18.89,14.02 19.25,13.66 19.25,10.45 D5.2
N$20
  Top 0.152: R_TYPE_SEL.2 16.3,20.73 R1_EP_DR.1 16.52,20.51 SJ1.2
N$21
  Top 0.152: C2-EP-DR.1 16.7,15.79 D4.2 19.05,15.28 20.71,13.62 D2.1
N$22
  Top 0.152: J2.4 12.16,21.75 EPD_C2.2
N$23
  Top 0.152: J2.5 11.43,21.25 11.99,20.69 EPD_C1.2
N$24
  Top 0.152: C32.1 11.67,6.08 IC2.A2
N$25
  Top 0.152: J2.18 10.95,14.75 11.84,13.86 12.57,13.86 EPD_C6.2
N$26
  Top 0.152: J2.19 10.97,14.25 12.31,12.91 EPD_C7.2
N$27
  Top 0.152: J2.20 10.93,13.75 12.55,12.13 15.17,12.13 EPD_C8.2
N$28
  Top 0.152: R2_USB.1 21.25,28.19 J4.B5
N$29
  Top 0.152: J2.22 10.96,12.75 12.28,11.43 EPD_C10.2
N$30
  Top 0.254: C2.1 38.26,22.94 X1.3 38.56,20.82 U1.P$A23
N$31
  Top 0.152: J2.24 10.74,11.63 10.86,11.63 12.3,10.19 EPD_C12.2
N$34
  Top 0.152: J4.A5 24.25,27.57 R1_USB.2
OUT+
  Top 0.152: TP_OP.TP 9.09,6.1 9.6,6.61 11.7,6.61 IC2.A3
OUT-
  Top 0.152: TP_ON.TP 11.96,8.33 IC2.C3
P0.00/XL1
  Top 0.152: U1.P$D2 32.18,18.68 31.38,18.68 30.76,19.3 28.64,19.3 X2.1 27.04,17.7 C17.2
P0.01/XL2
  Top 0.152: U1.P$F2 32.18,18.4 30.24,18.4 X2.2 29.98,17.14 C18.2
P0.13
  Top 0.127: 33.8,13.56 U1.P$AD8 | 16.65,3.53 R5.1 | 10.68,4.29 10.68,3.91 SW2.2 | 15.25,3.53 C30.1
  Top 0.152: 33.8,13.56 33.8,12.68 34.15,12.32 34.15,10.1 33.18,9.13 23.01,9.13 17.41,3.53 16.78,3.53 R5.1 | 16.65,3.53 15.38,3.53 C30.1 | 10.68,4.29 11.7,5.31 12.84,5.31 13.18,5.65 13.52,5.65 15.25,3.91 15.25,3.53
P0.14  (via drill 0.2 pad 0.35, 0.3)
  Top 0.127: 19.82,3.53 C31.1 19.95,3.53 | U1.P$AC9 34.05,14.07 v34.03,14.05 | 21.6,3.91 SW1.2
  Top 0.152: 19.82,3.53 19.35,3.53 R8.1 | v21.98,4.8 21.98,4.29 21.6,3.91 | v20.46,4.04 19.95,3.53
  Bottom 0.152: v20.46,4.04 21.22,4.04 v21.98,4.8
  Power 0.152: v21.98,4.8 22.49,4.8 31.64,13.94 33.92,13.94 v34.03,14.05
P1.01  (via drill 0.2 pad 0.35)
  Top 0.127: U1.P$Y23 37.86,14.83 v37.79,14.8
  Top 0.152: R_PWR_EDP.1 28.66,22.05 Q1.1 28.06,21.45 v28.06,20.56
  GND 0.152: v37.79,14.8 39.06,14.8 39.48,14.38 39.48,11.24 39.31,11.07 31.32,11.07 30.67,11.72 29,11.72 26.22,14.5 26.22,18.69 28.06,20.53 v28.06,20.56
P1.02  (via drill 0.2 pad 0.35)
  Top 0.127: 29.98,3.28 R7.1 | 31,3.28 C29.1 31.13,3.28 | 32.52,3.78 SW3.2
  Top 0.152: U1.P$W24 38.43,15.18 v38.88,15.18 | v35.68,8.45 35.68,7.24 32.6,4.16 SW3.2 | 31,3.28 29.98,3.28 | 31.13,3.28 32.02,3.28 32.52,3.78
  GND 0.152: v38.88,15.18 39.28,15.18 39.89,14.57 39.89,11.21 39.43,10.75 37.62,10.75 35.68,8.81 v35.68,8.45
PMIC_INT  (via drill 0.2 pad 0.35, 0.3)
  Top 0.127: U1.P$T2 32.27,15.85 v32.28,15.79
  Top 0.152: v8.78,32.36 8.01,32.36 7.89,32.23 IC1.A1
  Bottom 0.127: 38.62,15.6 32.91,15.6 32.78,15.72 32.4,15.72 v32.28,15.79
  Bottom 0.152: 38.62,15.6 41.8,18.77 41.8,20.68 39.64,22.83 33.41,22.83 33.29,22.71 18.74,22.71 9.09,32.36 v8.78,32.36
PREVGH
  Top 0.152: J2.21 10.19,13.25 9.93,12.99 9.93,11.45 10.12,11.26 10.43,11.26 12.05,9.64 15.52,9.64 15.52,9.73 EPD_C9.2 15.8,10.01 15.82,7.24 19.55,7.24 D5.1
PREVGL
  Top 0.152: J2.23 10.93,12.25 12.42,10.76 15.33,10.76 EPD_C11.2 16.78,11.43 D2.2
RESE
  Top 0.152: J2.3 10.68,22.3 14.23,22.3 14.5,22.03 Q3.2 16.88,21.7 R1_EP_DR.2
RESET  (via drill 0.2 pad 0.35, 0.3)
  Top 0.127: U1.P$AC13 35.06,14.07 U1.P$AC13 | 43.7,28.8 TP_RESET.TP | 40.27,29.82 J1.6
  Top 0.152: v40.91,23.98 40.91,26.01 42.94,28.04 | 43.7,28.8 42.94,28.04 | 40.27,29.82 40.78,29.82 41.41,29.18 41.8,29.18 42.94,28.04
  GND 0.127: 32.91,15.6 37.1,15.6 39.13,17.63
  GND 0.152: 32.91,15.6 32.52,15.21 32.52,14.83 33.8,13.56 34.68,13.56 34.94,13.82 34.94,13.94 U1.P$AC13 | 39.13,17.63 39.13,22.2 v40.91,23.98
  other vias: 35.04,14.04
RF
  Top 0.152: C4.2 41.94,17.85 42.01,17.78 | C22.2 42.7,10.5
  Top 0.762: L1.2 42.01,17.78 42.7,17.09 42.7,10.5 ANT1.1
SCK  (via drill 0.3, 0.3 pad 0.6)
  Top 0.127: v33.92,20.55 34.3,20.55 34.81,20.04 U1.P$A12 | 10.68,17.25 J2.13
  Top 0.152: 10.68,17.25 12.08,17.25 12.59,16.74 v12.64,16.73
  GND 0.127: 12.71,16.74 v12.64,16.73
  GND 0.152: v33.92,20.55 33.41,20.04 29.98,20.04 28.97,21.06 17.54,21.06 13.22,16.74 12.71,16.74
SCL  (via drill 0.2 pad 0.35, 0.3)
  Top 0.127: 2.93,30.71 U3.7 | U1.P$M2 32.27,16.74 v32.28,16.8 | 28.27,14.13 28.33,14.07 | 13.22,8.1 IC2.C1 | 3.95,3.78 IC3.12 | 14.24,26.64 R4.2 | 32.14,6.32 TP_SCL.TP | v26.18,13.82 26.3,13.82
  Top 0.152: 2.93,30.71 v2.93,31.47 2.93,32.23 5.06,34.35 7.12,34.35 7.51,33.97 7.51,32.23 IC1.B1 | 28.33,14.07 v29.22,14.07 | R17.2 28.27,14.13 27.45,14.96 26.3,13.82 | 13.22,8.1 13.22,8.48 v13.35,8.61 | v4.97,3.4 4.33,3.4 3.95,3.78 | v14.24,26.14 14.24,26.64 | v31.13,7.34 32.14,6.32
  Bottom 0.127: v29.22,14.07 31.89,16.74 32.27,16.74 v32.28,16.8 | 3.32,31.47 v2.93,31.47
  Bottom 0.152: 12.21,8.61 10.17,8.61 v4.97,3.4 | 12.21,8.61 v13.35,8.61 | 12.08,13.82 12.08,9.37 12.21,9.24 12.21,8.61 | 12.08,13.82 12.08,17.75 14.24,19.91 v14.24,26.14 10.3,30.07 4.71,30.07 3.32,31.47 | v31.13,7.34 31.13,7.85 25.67,13.31 | 25.67,13.31 15,13.31 14.49,13.82 12.08,13.82 | 25.67,13.31 v26.18,13.82
SDA  (via drill 0.2 pad 0.35, 0.3)
  Top 0.127: 2.43,30.71 U3.8 | 14.87,26.77 R2.2 | v31,16.99 31.76,16.99 U1.P$L1 | v28.84,14.58 28.46,14.58 27.98,15.06 R18.2 | 4.59,4.42 IC3.2 | 28.97,6.2 TP_SDA.TP
  Top 0.152: v3.44,32.11 5.41,34.07 6.94,34.07 7.12,33.88 7.12,32.23 IC1.C1 | v2.3,31.47 2.3,30.84 2.43,30.71 | v15.38,26.77 14.87,26.77 | v6.87,4.67 5.28,4.67 5.03,4.42 4.59,4.42 | v20.71,6.2 28.97,6.2
  GND 0.127: 12.71,7.59 IC2.B2 12.59,7.72
  GND 0.152: v20.71,6.2 19.82,6.2 18.43,7.59 12.71,7.59 | v15.38,26.77 15.38,21.3 11.92,17.84 11.92,9.53 12.59,8.86 12.59,7.72
  Bottom 0.127: 15.1,26.77 v15.38,26.77 | v3.44,32.11 4.2,32.87 | v31,16.99 31,16.74 v28.84,14.58 | 12.59,7.59 IC2.B2
  Bottom 0.152: v3.44,32.11 2.93,32.11 v2.3,31.47 | 15.1,26.77 9,32.87 4.2,32.87 | 12.59,7.59 9.79,7.59 v6.87,4.67
  Power 0.152: v28.84,14.58 21.98,7.72 12.71,7.72 IC2.B2
  other vias: 12.69,7.6
SWDCLK  (via drill 0.2 pad 0.35, 0.3)
  Top 0.127: 40.32,11.1 40.27,11.15 v40.26,11.04 | 33.67,32.36 TP_SWDCLK.TP | 39,29.82 J1.4
  Top 0.152: U1.P$AA24 40.19,14.54 40.47,14.26 40.47,11.25 40.32,11.1 | 33.67,32.36 34.68,33.38 36.99,33.38 37.99,32.38 37.99,31.22 38.88,30.33 38.88,29.95 J1.4 | 39,29.82 v39.64,29.18
  Bottom 0.152: v39.64,29.18 39.64,28.93 44.8,23.77 44.8,15.04 44.21,14.45 43.95,14.45 43.45,13.94 43.45,13.69 41.54,11.79 41.29,11.79 40.65,11.15 40.27,11.15 v40.26,11.04
  Power 0.152: v35.32,9.62 35.45,9.75 36.24,9.75 36.83,10.34 39.92,10.34 40.26,10.68 v40.26,11.04
SWDIO  (via drill 0.2 pad 0.35, 0.3)
  Top 0.127: 37.61,29.95 J1.2 37.61,29.82 | 33.67,29.44 TP_SWDIO.TP
  Top 0.152: U1.P$AC24 40.05,14.04 40.13,13.96 40.13,12.5 v39.08,11.45 | 37.61,29.95 36.97,29.95 36.72,30.2 34.43,30.2 33.67,29.44 | 37.61,29.82 v38.24,29.18
  Bottom 0.152: v38.24,29.18 37.99,28.93 37.99,26.13 44.46,19.65 44.46,17.25 44.21,16.99 43.95,16.99 43.45,16.48 43.45,14.96 41.54,13.05 41.29,13.05 39.76,11.53 39.13,11.53 v39.08,11.45
  Power 0.152: v39.08,11.45 38.71,11.08 36.69,11.08 35.74,10.13 v35.29,10.13
SWO
  Top 0.152: U1.P$AD22 37.29,10.85 36.24,9.8 36.24,5.62 TP_SWO.TP
VBAT
  Top 0.254: C37.1 7.09,30.34 IC1.C2 | C27.1 2.42,27.78 2.93,28.29 U3.2 U3.3
  Top 0.305: U3.3 3.43,26.75 TP_VBAT.TP 5.73,27.75 5.73,28.98 C37.1
VBUS  (via drill 0.3, 0.3 pad 0.6)
  Top 0.127: 32.4,12.17 C21.1
  Top 0.25: U1.P$AD2 32.29,12.23
  Top 0.254: IC1.A2 9.41,31.77 C38.1 10.11,31.79 10.36,32.04 10.36,33.51 10.38,33.53 16.17,33.53 17.34,32.36 v17.34,31.57 17.34,27.56 19.67,27.56 20.6,28.49 J4.A9_B4 | D1.5 | v24.78,31.58 25.06,31.3 25.06,29.92 25.4,29.58 J4.A4_B9 25.4,27.54 C43.1 26.25,27.49 C42.1
  Top 0.305: 32.29,12.23 C21.1 | v30.38,27.32 D1.5 | 32.4,12.17 32.91,11.66 32.91,10.28 32.55,9.92 29.3,9.92 25.6,13.62 25.6,20.22 v25.92,20.55
  Bottom 0.254: v24.77,31.57 v24.78,31.58 | 30.38,31.29 30.1,31.57
  Bottom 0.305: v17.34,31.57 v24.77,31.57 30.1,31.57 | v30.38,27.32 30.38,31.29
  Power 0.127: 30.31,27.13 v30.38,27.32
  Power 0.305: v25.92,20.55 25.92,22.73 30.31,27.13
VREG
  Top 0.254: IC1.B2 7.49,30.54 C39.1 | IC9.A3 IC9.A2 IC9.A1 | C23.2
  Top 0.305: C23.2 9.87,30.12 | 9.87,30.12 9.43,30.55 TP_VREG.TP | 9.87,30.12 C39.1 | C24.2 10.68,30.93 9.87,30.12 | IC9.A3 C23.2
(copper drawn outside any net)
  shapes: Bottom area x1, GND area x2, Top area x5